# EAGLE board myboard (EAGLE 8.2.2)
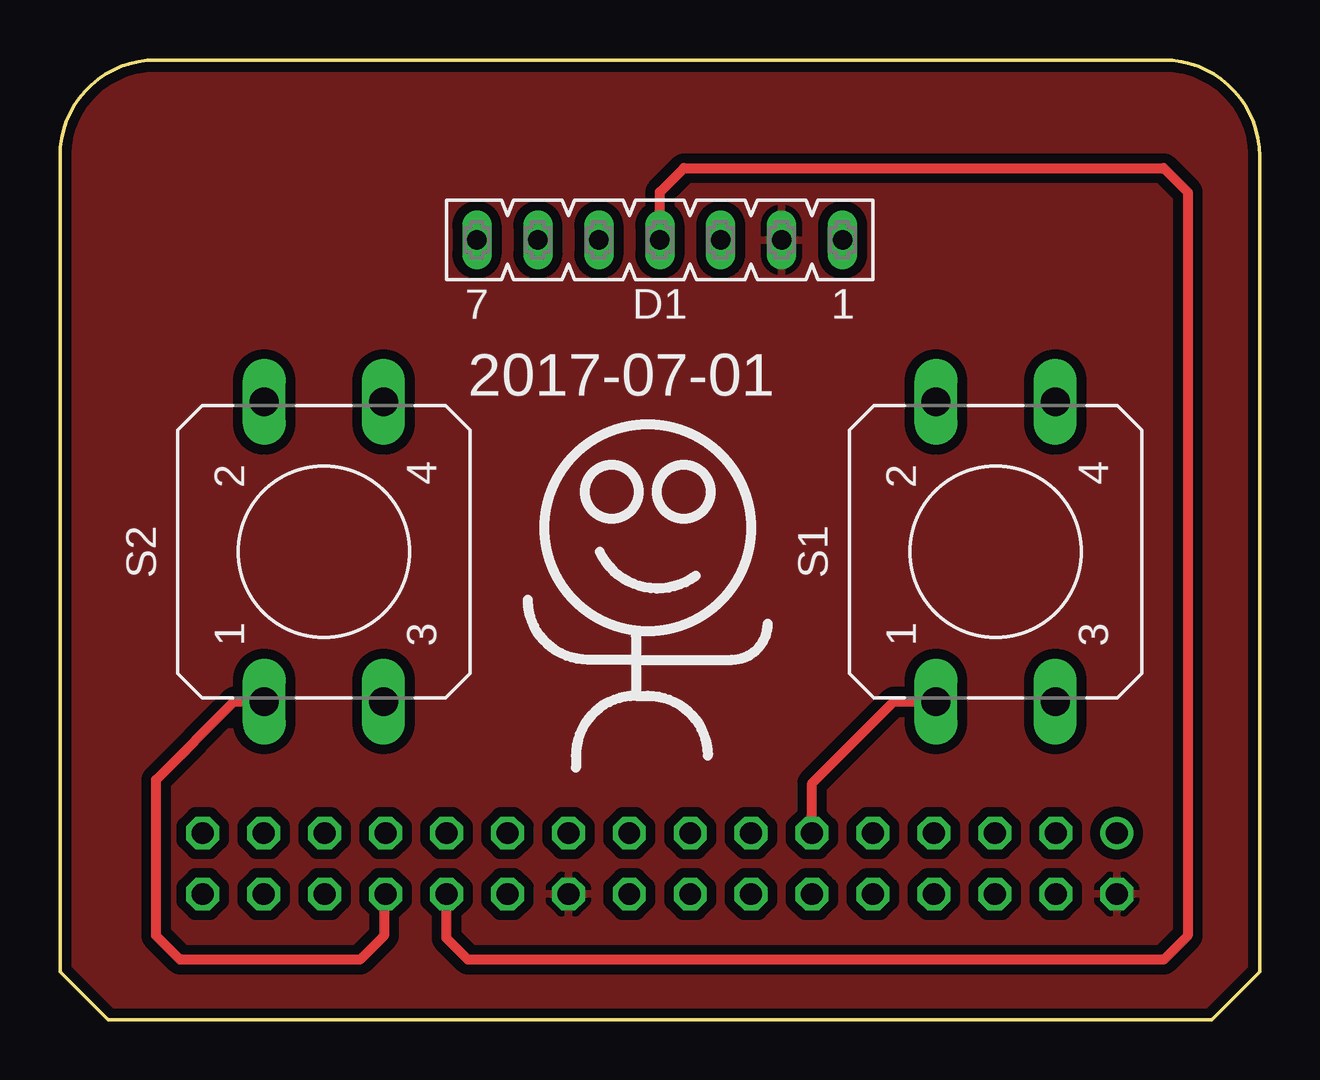
[diagram p0: board, top side]
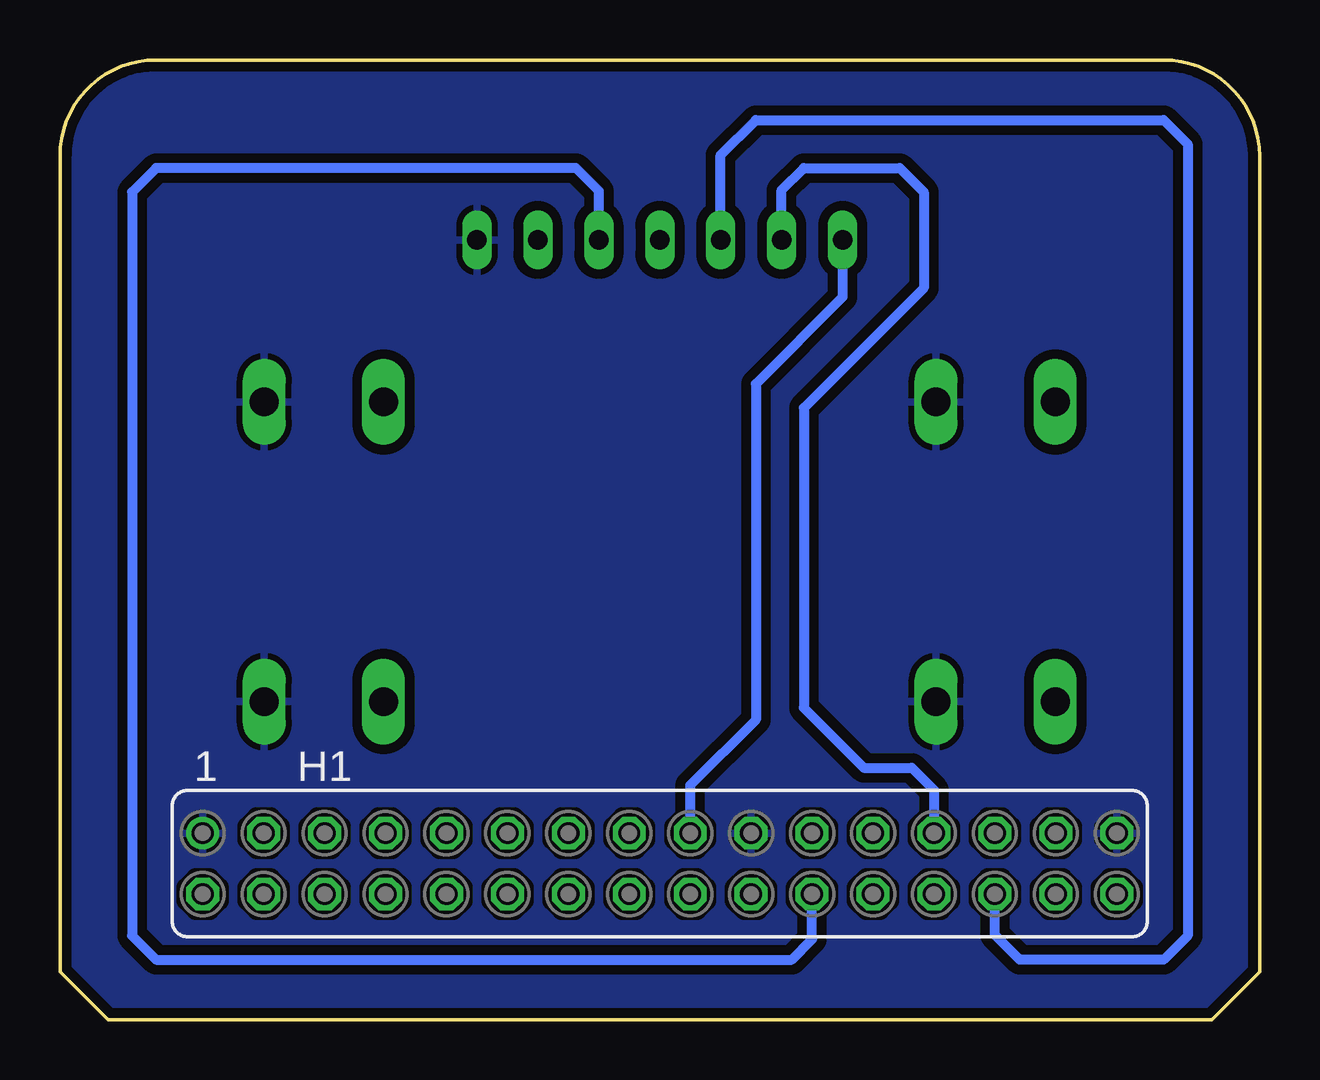
[diagram p1: board, bottom side, seen from below]

Size 50 x 40 mm. Coordinates in mm from the lower left corner, seen from the top.
Outline: 4,40 46,40 arc-90 50,36 50,2 48,0 2,0 0,2 0,36 arc-90 4,40
Copper layers (1*16): Top 0.0356mm / dielectric 1.5011mm / Bottom 0.0356mm
Design rules "oshpark-2layer": minimum track width 6mil, minimum drill 13mil, track to track 6mil, track to pad 6mil, pad to pad 6mil, via to via 6mil, smd to smd 6mil, copper to edge 15mil, drill to drill 6mil, minimum pad ring 7mil, minimum via ring 7mil, stop-mask expansion 2.5mil, vias tented up to drill 0mil, thermal gap 10mil

## Footprints (pad centres in the part's own frame; a part is rotated, then mirrored left to right if it is on the bottom)
FE07 = drill 0.813 long: 1 -7.62,0; 2 -5.08,0; 3 -2.54,0; 4 0,0; 5 2.54,0; 6 5.08,0; 7 7.62,0
FE16-2 = drill 0.914: 1 -19.05,1.27 | drill 0.914 octagon: 2 -19.05,-1.27; 3 -16.51,1.27; 4 -16.51,-1.27; 5 -13.97,1.27; 6 -13.97,-1.27; 7 -11.43,1.27; 8 -11.43,-1.27; 9 -8.89,1.27; 10 -8.89,-1.27; 11 -6.35,1.27; 12 -6.35,-1.27; 13 -3.81,1.27; 14 -3.81,-1.27; 15 -1.27,1.27; 16 -1.27,-1.27; 17 1.27,1.27; 18 1.27,-1.27; 19 3.81,1.27; 20 3.81,-1.27; 21 6.35,1.27; 22 6.35,-1.27; 23 8.89,1.27; 24 8.89,-1.27; 25 11.43,1.27; 26 11.43,-1.27; 27 13.97,1.27; 28 13.97,-1.27; 29 16.51,1.27; 30 16.51,-1.27; 31 19.05,1.27; 32 19.05,-1.27
MY-B3F-40XX = drill 1.194 long: 1 -6.248,2.489; 2 6.248,2.489; 3 -6.248,-2.489; 4 6.248,-2.489

## Placement (x,y rotation side)
D1  [FE07]  25,32.5 180 top
H1  FE16-2  [FE16-2]  25,6.5 0 bottom
S1  [MY-B3F-40XX]  39,19.5 90 top
S2  [MY-B3F-40XX]  11,19.5 90 top

## Library data of the parts
D1 H1 S1 S2 = mylib

## Nets
3V3: D1.2 H1.2 H1.20
BTN1: H1.11 S1.1
BTN2: H1.26 S2.1
CS: D1.7 H1.17
DC: D1.6 H1.25
GND: D1.1 H1.1 H1.19 H1.31 S1.3 S1.4 S2.3 S2.4
MOSI: D1.4 H1.24
RES: D1.5 H1.28
SCLK: D1.3 H1.22

## Tracks (layer width: path | path; a pad name or v marks a point on that pad's centre or on a via)
3V3
  pour Top (isolate 0.406): 0,2 2,0 48,0 50,2 50,36 arc90 46,40 4,40 arc90 0,36
BTN1
  Top 0.406: H1.11 31.35,9.85 34.75,13.25 S1.1
BTN2
  Top 0.406: H1.26 13.5,5.16 13.5,3.5 12.5,2.5 5,2.5 4,3.5 4,10 7.25,13.25 S2.1
CS
  Bottom 0.406: D1.7 17.38,30.12 21,26.5 21,12.5 23.73,9.77 H1.17
DC
  Bottom 0.406: D1.6 19.92,34.58 19,35.5 15,35.5 14,34.5 14,30.5 19,25.5 19,13 16.5,10.5 14.5,10.5 13.57,9.57 H1.25
GND
  pour Bottom (isolate 0.406): 0,2 2,0 48,0 50,2 50,36 arc90 46,40 4,40 arc90 0,36
MOSI
  Top 0.406: D1.4 25,34.5 26,35.5 46,35.5 47,34.5 47,3.5 46,2.5 17,2.5 16.11,3.39 H1.24
RES
  Bottom 0.406: D1.5 22.46,36.04 21,37.5 4,37.5 3,36.5 3,3.5 4,2.5 10,2.5 11.03,3.53 H1.28
SCLK
  Bottom 0.406: D1.3 27.54,34.54 28.5,35.5 46,35.5 47,34.5 47,3.5 46,2.5 19.5,2.5 18.65,3.35 H1.22

## Text on the board
tPlace: 2017-07-01